# Altium PCB switch_pcb.PcbDoc
Units mm, origin at the board's own origin, x right, y up, seen from the top; angles counter-clockwise.
Board outline 50.04 x 50.04 mm, 2 copper layers (Top Layer, Bottom Layer), stack 1.595 mm thick; 16 components, 15 nets, 64 pads, 4 vias.
Unrouted connection lines stored in the file: 12.
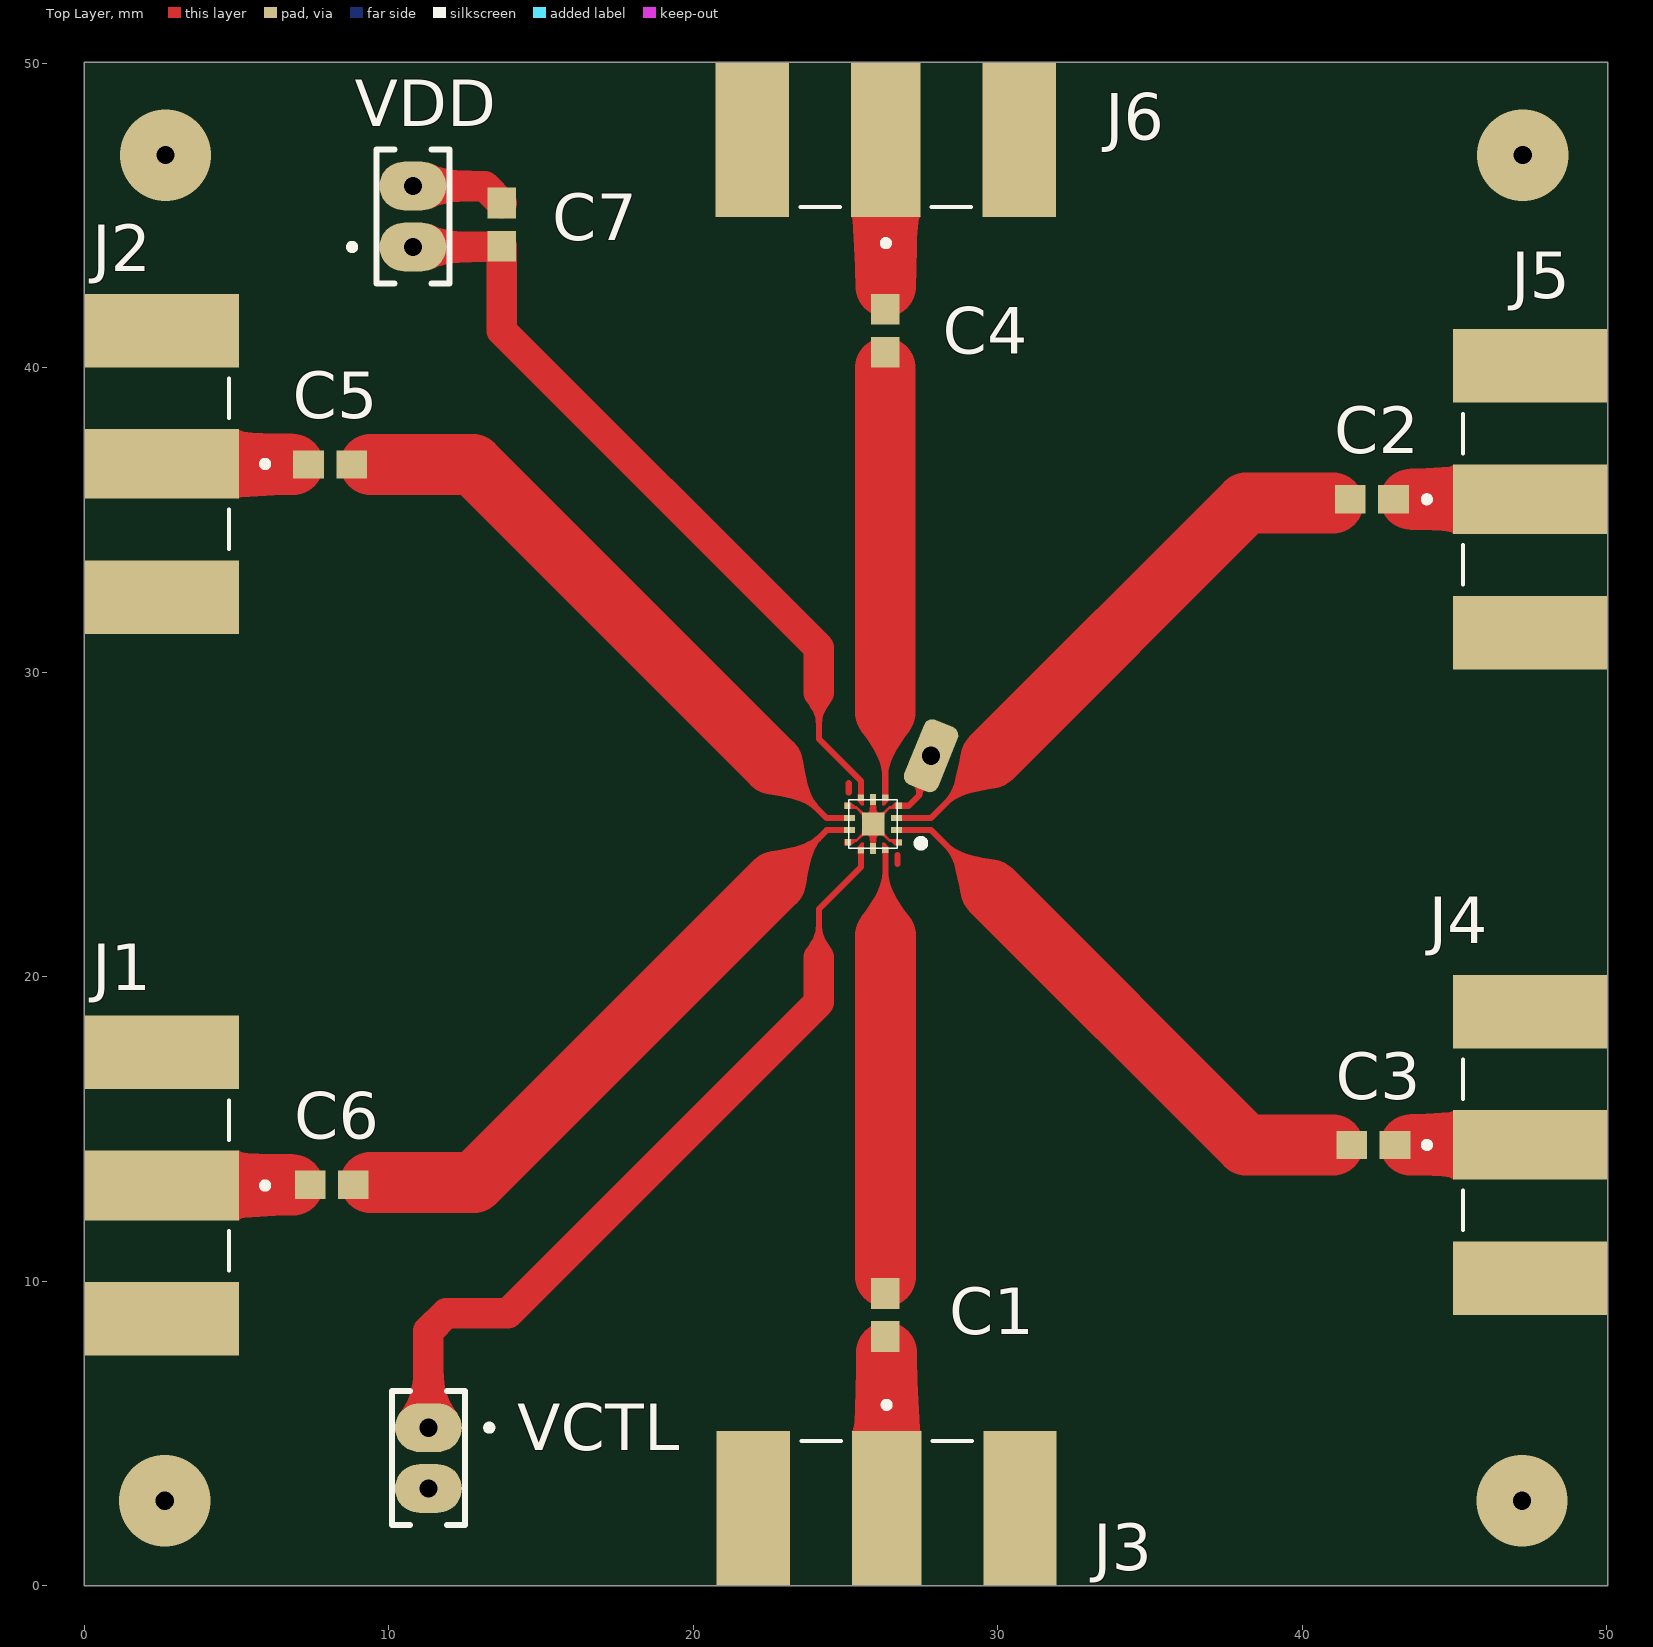
[diagram p0: Top Layer view]
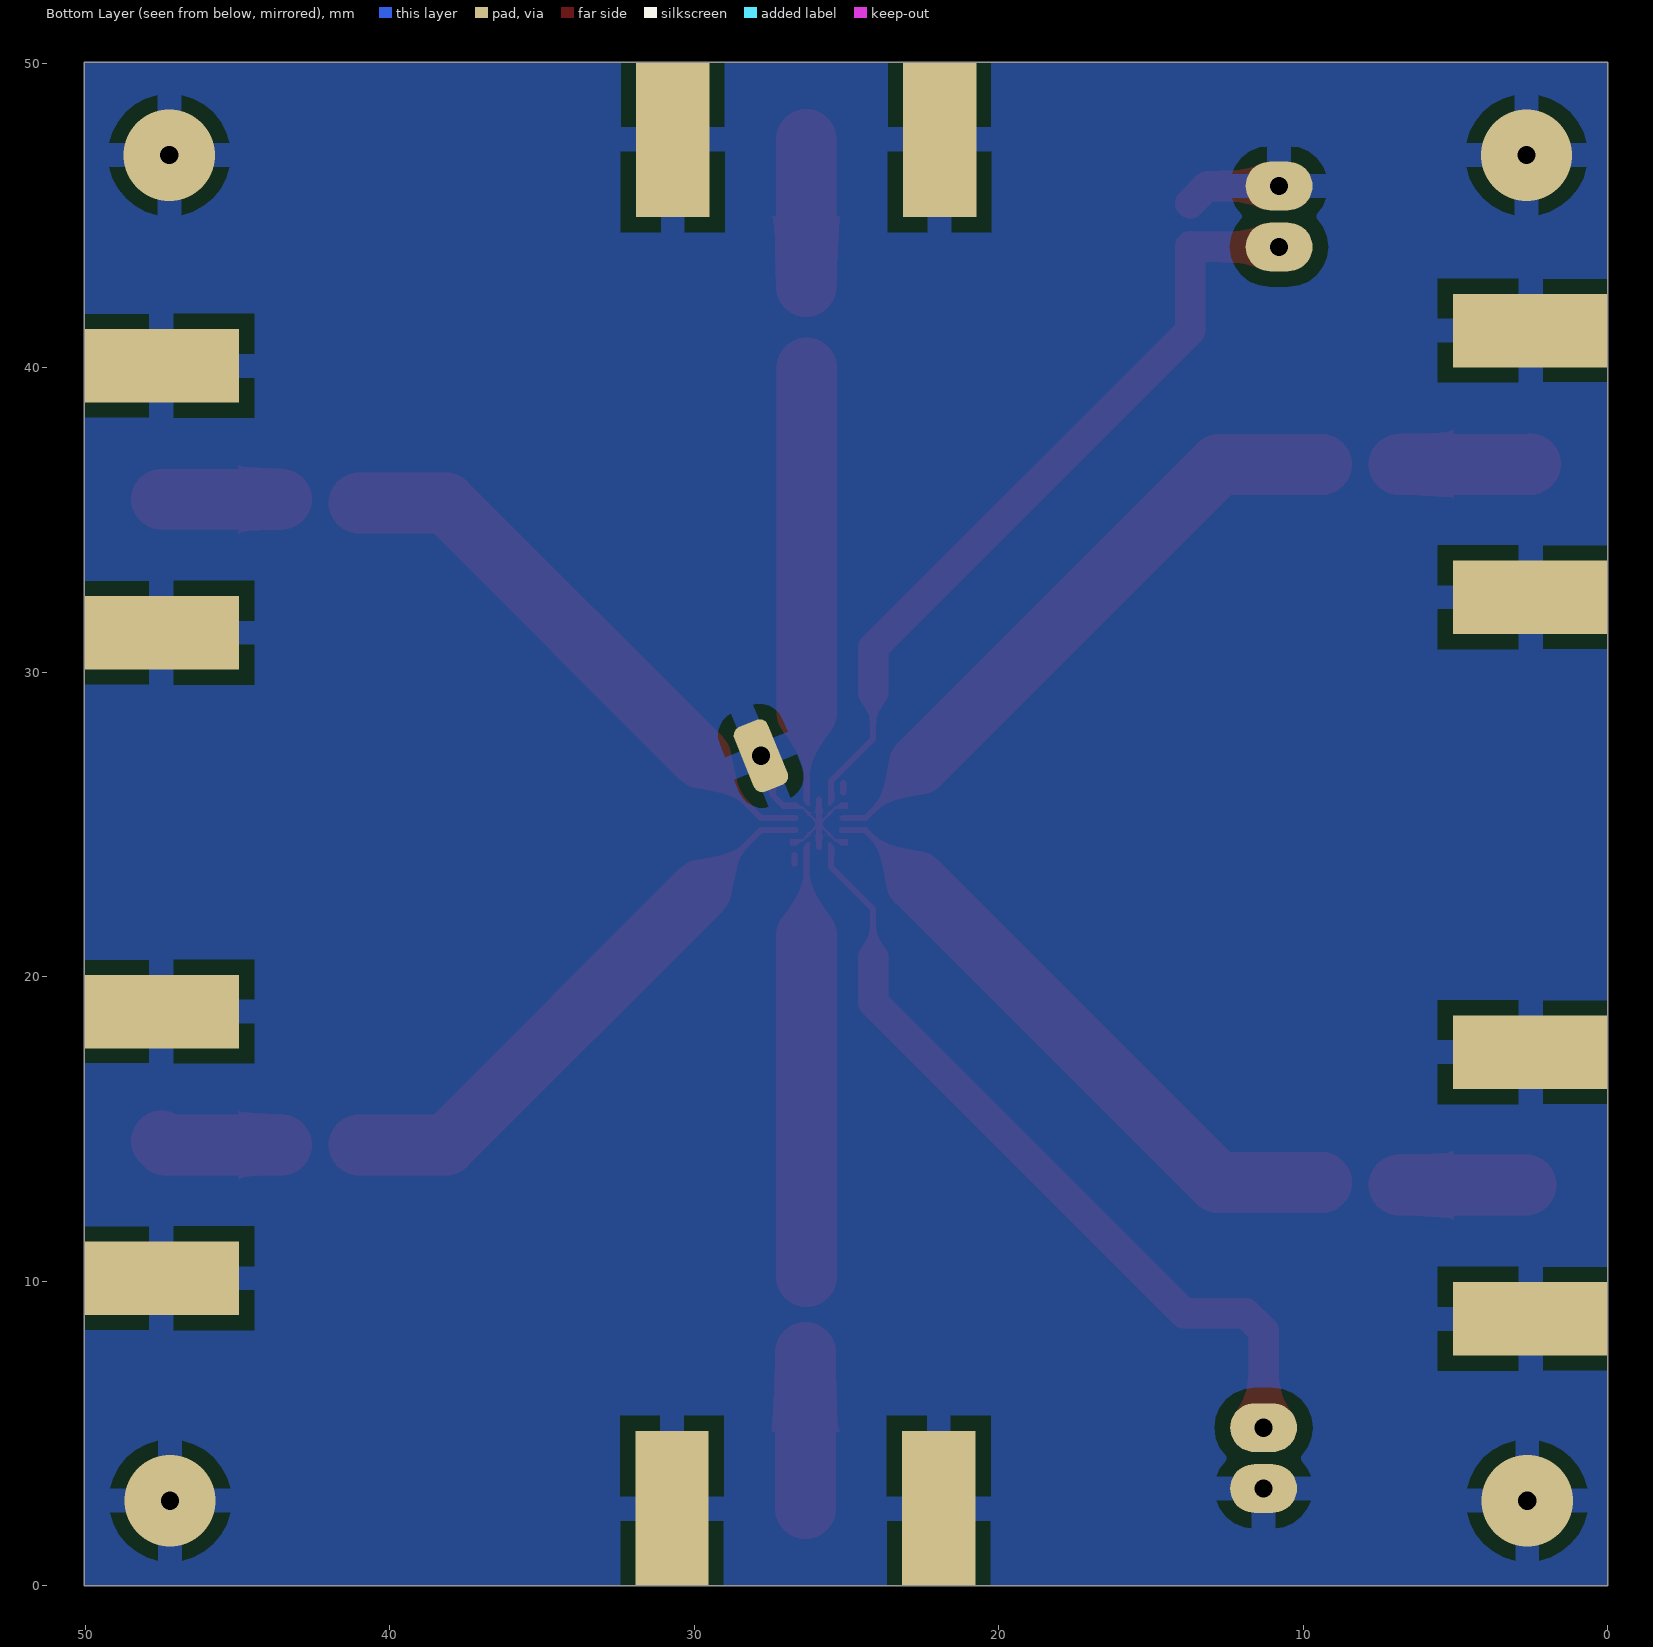
[diagram p1: Bottom Layer view, seen from below]
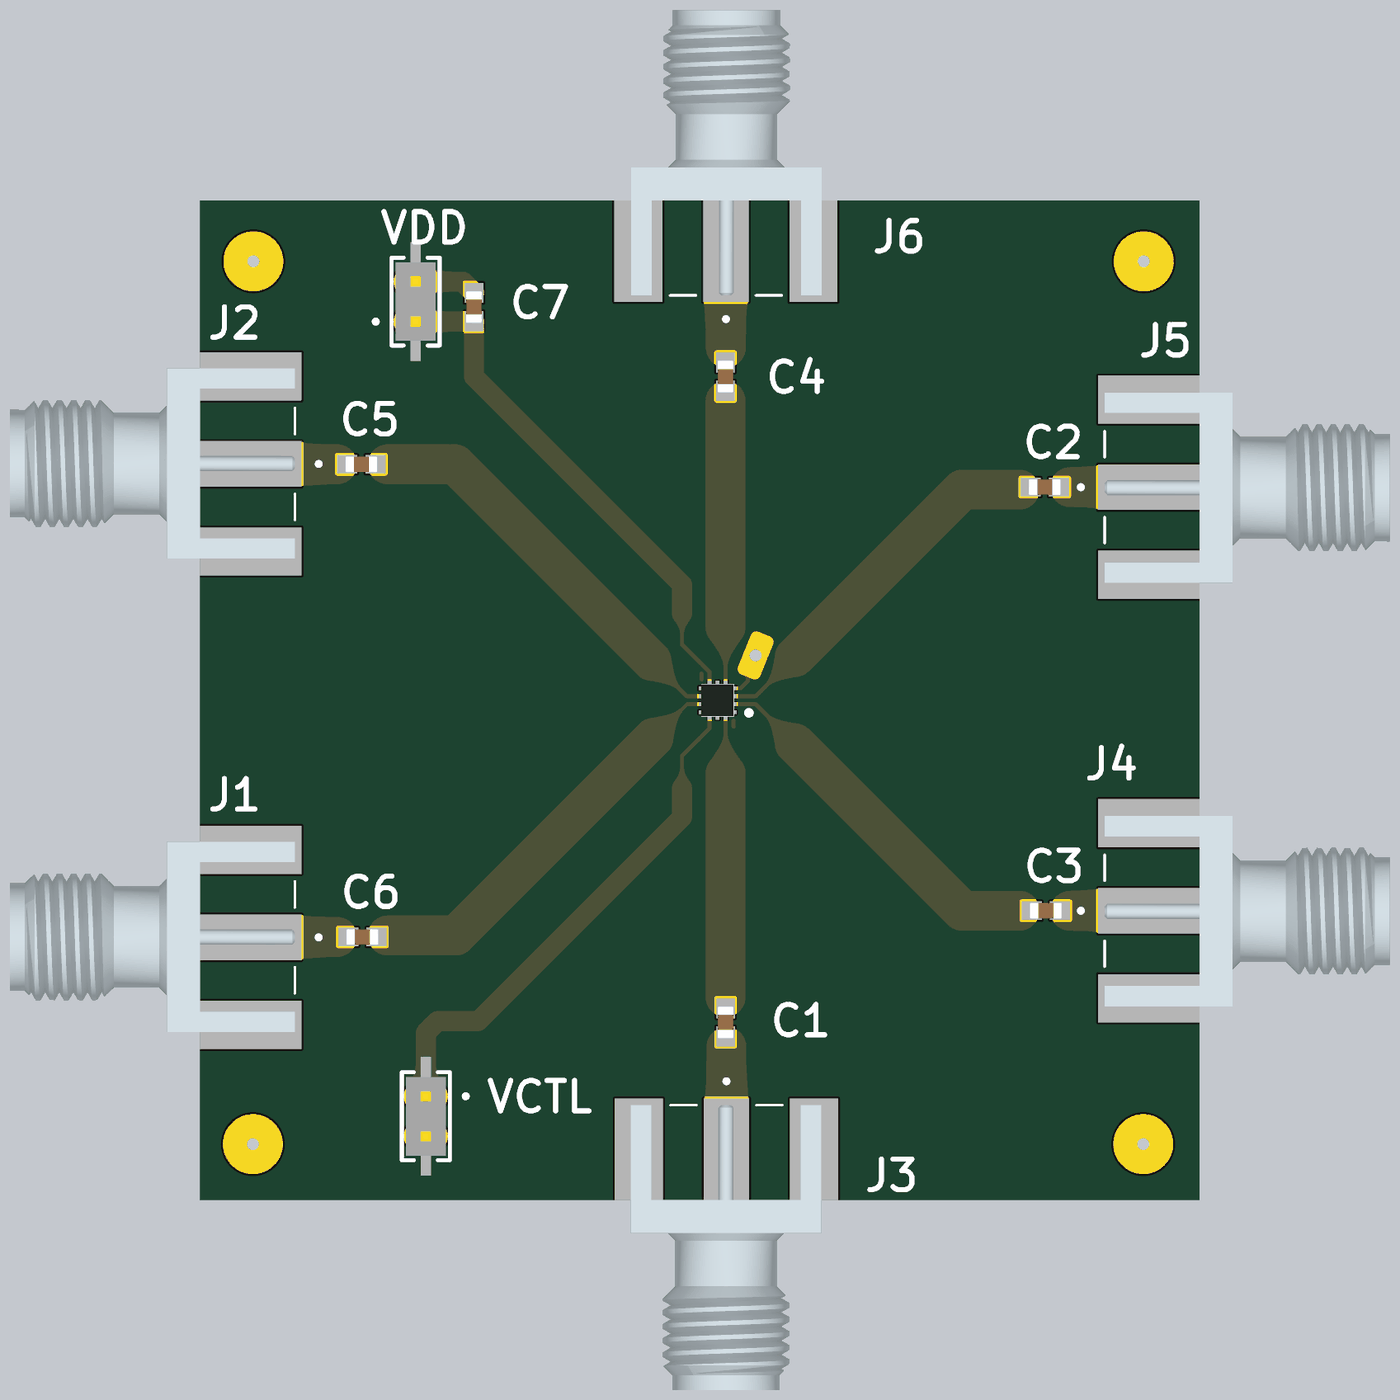
[diagram p2: 3D render of the assembled board from above, using the file's embedded part models]

## Layer stack, top to bottom
Top Solder: solder mask 0.0102, Solder Resist, Dk 3.5
Top Layer: signal copper 0.0356
Dielectric 1: dielectric 1.524, FR-4, Dk 4.8
Bottom Layer: signal copper 0.0356
Bottom Solder: solder mask 0.0102, Solder Resist, Dk 3.5

## Board outline
0,50.038 0,0 50.038,0 50.038,50.038

## Design rules (kind name [scope] priority, off if disabled: settings)
Clearance [All] p1: gap=0.1 ignorepadtopadclearanceinfootprint=FALSE except(0.5: THPad-Poly Fill-Text Fill-Hole Poly-Text Poly-Hole Region-Text Region-Hole)
PlaneClearance [All] p1: clearance=0.5
PlaneConnect [All] p1: planeconnectstyle=Relief reliefexpansion=1 reliefentries=4 reliefconductorwidth=1 reliefairgap=1
PolygonConnect [All] p1: connectstyle=Relief reliefconductorwidth=0.8 reliefentries=4 polygonreliefangle="90 Angle" airgapwidth=0.5
RoutingVias [All] p1: holewidth=0.711 width=1.27 viastyle="Through Hole" minholewidth=0.711 minwidth=1.27 maxholewidth=0.711 maxwidth=1.27
SolderMaskExpansion [All] p1: expansion=0.102
Width [All] p1: maxlimit=2 minlimit=0.09 preferedwidth=1 minimp=50.000000 maximp=50.000000 favimp=50.000000
28 further rules are at their usual default settings.

## Classes and differential pairs
component class switch_esquematico: C1 C2 C3 C4 C5 C6 C7 J1 J2 J3 J4 J5 J6 VCTL

## Components (designator, comment, footprint, x,y, rotation, side; value= is the part's Value field where it differs from the comment)
C1 "" CAPC1608X90N 26.311,8.89 r270 top
C2 "" CAPC1608X90N 42.291,35.687 r0 top
C3 "" CAPC1608X90N 42.344,14.478 r0 top
C4 "" CAPC1608X90N 26.308,41.222 r90 top
C5 "" CAPC1608X90N 8.075,36.83 r0 top
C6 "" CAPC1608X90N 8.128,13.168 r0 top
C7 "" CAPC1608X90N 13.716,44.704 r90 top
J1 "" CINCH_142-0701-801 2.54,13.144 r90 top
J2 "" CINCH_142-0701-801 2.54,36.846 r90 top
J3 "" CINCH_142-0701-801 26.352,2.54 r180 top
J4 "" CINCH_142-0701-801 47.498,14.478 r270 top
J5 "" CINCH_142-0701-801 47.498,35.684 r270 top
J6 "" CINCH_142-0701-801 26.328,47.498 r0 top
VCTL "" SAMTEC_MTMM-101-10-G-D-135 11.303,4.191 r180 top
VDD "" SAMTEC_MTMM-101-10-G-D-135 10.795,44.974 r0 top
? "SKY13421-486LF" SKY13421_486LF 25.908,25.019 r180 top

## Footprints (in the part's own frame and the unit in brackets; to place one, negate y for a bottom-side part, rotate by r counter-clockwise, add the part's x,y. Pads: shape width x height; smd on the part's side, far side on the other; paste and mask are expansions set on the pad)
CAPC1608X90N [mm]
  rect 1.01x0.93 smd: 1(-0.709,0) 2(0.709,0)
  body extent -0.8,-0.4 0.8,0.4, height 0.9
CINCH_142-0701-801 [mil]
  rect 90x200 smd: 1(0,0)
  rect 95x200 smd: S1(-172.5,0) S2(172.5,0)
  rect 95x200 smd far side: S3(-172.5,0) S4(172.5,0)
  silkscreen extent -110,-138 110,-87, body extent -187,-87 188,475, height 170
SAMTEC_MTMM-101-10-G-D-135 [mm]
  oval 2.2x1.6 hole 0.6: 01(0,-1) 02(0,1)
  silkscreen extent -2.1,-2.2 1.2,2.2, body extent -1,-1.96 1,1.98, height 10.67
SKY13421_486LF [mm] "DPxDT 2:1 DIFFERENTIAL SWITCH"
  rect 0.2x0.2 smd mask+0: 1(-0.85,0.601) 4(-0.845,-0.6) 5(-0.4,-0.874) 7(0.4,-0.874) 8(0.845,-0.6) 11(0.824,0.6) 12(0.399,0.868) 14(-0.4,0.86)
  rect 0.36x0.2 smd mask+0.07: 2(-0.77,0.2) 3(-0.77,-0.2) 9(0.769,-0.2) 10(0.769,0.2)
  rect 0.2x0.36 smd mask+0.07: 6(0,-0.8) 13(0,0.8)
  rect 0.74x0.74 smd mask+0.07: 15(0,0)
  Top Layer region: -0.59,-0.5 -0.59,-0.59 -0.72,-0.7 -0.95,-0.7 -0.95,-0.5
  Top Layer region: 0.59,0.5 0.59,0.59 0.72,0.7 0.95,0.7 0.95,0.5
  Top Layer region: -0.59,0.5 -0.59,0.59 -0.72,0.7 -0.95,0.7 -0.95,0.5
  Top Layer region: 0.59,-0.5 0.59,-0.59 0.72,-0.7 0.95,-0.7 0.95,-0.5
  Top Layer region: -0.3,-0.62 -0.39,-0.62 -0.5,-0.75 -0.5,-0.98 -0.3,-0.98
  Top Layer region: 0.3,-0.62 0.39,-0.62 0.5,-0.75 0.5,-0.98 0.3,-0.98
  Top Layer region: -0.3,0.62 -0.39,0.62 -0.5,0.75 -0.5,0.98 -0.3,0.98
  Top Layer region: 0.3,0.62 0.39,0.62 0.5,0.75 0.5,0.98 0.3,0.98
  Bottom Layer pour cut-out: 0,0.508
  Bottom Layer pour cut-out: 0,0.254
  silkscreen extent -1.68,-0.8 0.8,0.8, body extent -0.79,-0.8 0.81,0.8, height 0.54

## Part data
C1 C2 C3 C4 C5 C6 C7: library part C1608C0G1H102J080AA, "1000pF ±5% 50V Ceramic Capacitor C0G, NP0 0603 (1608 Metric)", Package="1608 TDK", Availability="In Stock", Check_prices=https://www.snapeda.com/parts/C1608C0G1H102J080AA/TDK-Lambda+Americas+Inc/view-part/?ref=eda, MF=TDK, MP=C1608C0G1H102J080AA, Price=None, Purchase-URL=https://pricing.snapeda.com/search/part/C1608C0G1H102J080AA/?ref=eda, SnapEDA_Link=https://www.snapeda.com/parts/C1608C0G1H102J080AA/TDK-Lambda+Americas+Inc/view-part/?ref=snap
J1 J2 J3 J4 J5 J6: library part 142-0701-801, "SMA Jack", Package=None, Availability=Unavailable, MF="Cinch Connectivity", MP=142-0701-801, Price=None, SnapEDA_Link=https://www.snapeda.com/parts/142-0701-801/Cinch%20Connectivity%20Solutions%20Johnson/view-part/107536/?ref=snap
VCTL VDD: library part MTMM-101-10-G-D-135, "Connector Header Through Hole 2 position", Package=None, Availability="In Stock", Check_prices=https://www.snapeda.com/parts/MTMM-101-10-G-D-135/Samtec/view-part/?ref=eda, MF=Samtec, MP=MTMM-101-10-G-D-135, Price=None, Purchase-URL=https://pricing.snapeda.com/search/part/MTMM-101-10-G-D-135/?ref=eda, SnapEDA_Link=https://www.snapeda.com/parts/MTMM-101-10-G-D-135/Samtec/view-part/?ref=snap
?: "0.1 to 3.0 GHz DPxDT 2:1 Differential Switch"

## Free pads (board coordinates)
  rrect50% 2.3x1.2 hole 0.6 rot 68 mask+0: 2(27.813,27.26)

## Via types
v1: diameter 3, hole 0.6, Top Layer to Bottom Layer, 4 vias

## Nets (pads, with @x,y where several pads share a name; then routed paths per layer and width w, separated by ;. In a path a pad name is that pad's centre, name@x,y a point inside that pad or via, vN(x,y) a via of type N, cw(c..) or ccw(c..) an arc to the next point about the centre after c; other vN are vias at no path point)
GND: ?.1 ?.4 ?.6 ?.8 ?.11 ?.13 ?.15 C7.2 J1.S1 J1.S2 J1.S3 J1.S4 J2.S1 J2.S2 J2.S3 J2.S4 J3.S1 J3.S2 J3.S3 J3.S4 J4.S1 J4.S2 J4.S3 J4.S4 J5.S1 J5.S2 J5.S3 J5.S4 J6.S1 J6.S2 J6.S3 J6.S4 pad.2 VCTL.02 VDD.02 | length 10.8
  Top Layer w0.09: 25.318,24.474 25.363,24.474 ?.15 ; 25.318,25.564 25.363,25.564 ?.15 ; ?.4 26.698,25.564 26.645,25.564 26.453,25.564 ?.15 ; ?.1 26.703,24.473 26.651,24.473 26.65,24.474 26.453,24.474 ?.15
  Top Layer w0.2: ?.13@25.908,24.257 ?.15 ?.6 ; ?.4 27.078,25.619 27.43,25.971 27.43,26.922 pad.2
  Top Layer w1: VDD.02 13.155,45.974 C7.2
  other v1: 2.644,2.794 47.221,2.794 2.667,46.99 47.244,46.99
Net_2: ?.2 C3.1 | length 18.6
  Top Layer w0.2: ?.2 27.813,24.819 29.772,22.86
  Top Layer w2: 29.772,22.86 38.154,14.478 41.021,14.478
Net_3: ?.3 C2.1 | length 18.6
  Top Layer w0.2: ?.3 27.813,25.219 29.772,27.178
  Top Layer w2: 29.772,27.178 38.154,35.56 41.021,35.56
Net_5: ?.5 C4.1 | length 14.1
  Top Layer w0.2: ?.5 26.308,28.683
  Top Layer w2: 26.308,28.683 26.308,40.005
Net_7: ?.7 C7.1 VDD.01 | length 25.9
  Top Layer w0.2: 24.13,29.337 24.13,27.813 25.508,26.435 ?.7
  Top Layer w1: VDD.01 13.665,43.974 13.686,43.995 C7.1 13.716,41.222 24.13,30.808 24.13,29.337
Net_9: ?.9 C5.2 | length 20.6
  Top Layer w0.2: 22.606,26.989 24.376,25.219 ?.9
  Top Layer w2: 9.398,36.83 12.765,36.83 22.606,26.989
Net_10: ?.10 C6.2 | length 20.5
  Top Layer w0.2: 22.701,23.136 24.384,24.819 ?.10 ?.10@25.147,24.819
  Top Layer w2: 9.398,13.24 12.805,13.24 22.701,23.136
Net_12: ?.12 VCTL.01 | length 26
  Top Layer w0.2: 24.13,20.637 24.13,22.225 25.508,23.603 ?.12 ?.12
  Top Layer w1: VCTL.01 11.303,8.368 11.889,8.954 13.917,8.954 24.13,19.166 24.13,20.637
Net_14: ?.14 C1.1 | length 14
  Top Layer w0.2: 26.311,21.355 ?.14@26.311,24.145
  Top Layer w2: 26.311,10.16 26.311,21.355
NetC1_2: C1.2 J3.1 | length 5.1
  Top Layer w2: J3.1 26.351,7.659
NetC2_2: C2.2 J5.1 | length 3.9
  Top Layer w2: 43.561,35.687 J5.1@47.498,35.687
NetC3_2: C3.2 J4.1 | length 4
  Top Layer w2: 43.561,14.478 47.371,14.478 J4.1@47.498,14.605
NetC4_2: C4.2 J6.1 | length 4.8
  Top Layer w2: 26.325,42.672 J6.1@26.325,47.498
NetC5_1: C5.1 J2.1 | length 4.3
  Top Layer w2: J2.1 2.556,36.83 6.858,36.83
NetC6_1: C6.1 J1.1 | length 4.2
  Top Layer w2: J1.1@2.683,13.168 6.858,13.168
copper on no net: | length 0.6
  Top Layer w0.2: 25.108,26.057 25.108,26.357 ; 26.708,23.703 26.708,24.003

## Polygon pours and split planes (outlines as drawn)
no net on Top Layer "Top Layer-No Net" (solid, pour order 0): 51.943,52.805
GND on Bottom Layer "Bottom Layer-GND" (solid, pour order 2): -0.005,50.038 0,50.033 0,0 50.043,0 50.038,0.005 50.038,50.038
no net on Mechanical 13 (solid): 49.977,0.254
no net on Drill Guide (solid): 0,50.038 0,0 50.043,0 50.043,50.033 50.038,50.038

## Other copper
Top Layer:
  region net GND: 26.628,24.319
  region net Net_14: 26.496,21.336
  region net Net_14: 26.092,20.701
  region net Net_14: 25.4,21.209
  region: 27.94,27.26
  region net Net_5: 26.253,27.305
  region net Net_5: 26.308,26.67
  region: 4.826,13.589